# Allegro board ZWAVE_SWITCHV2.brd
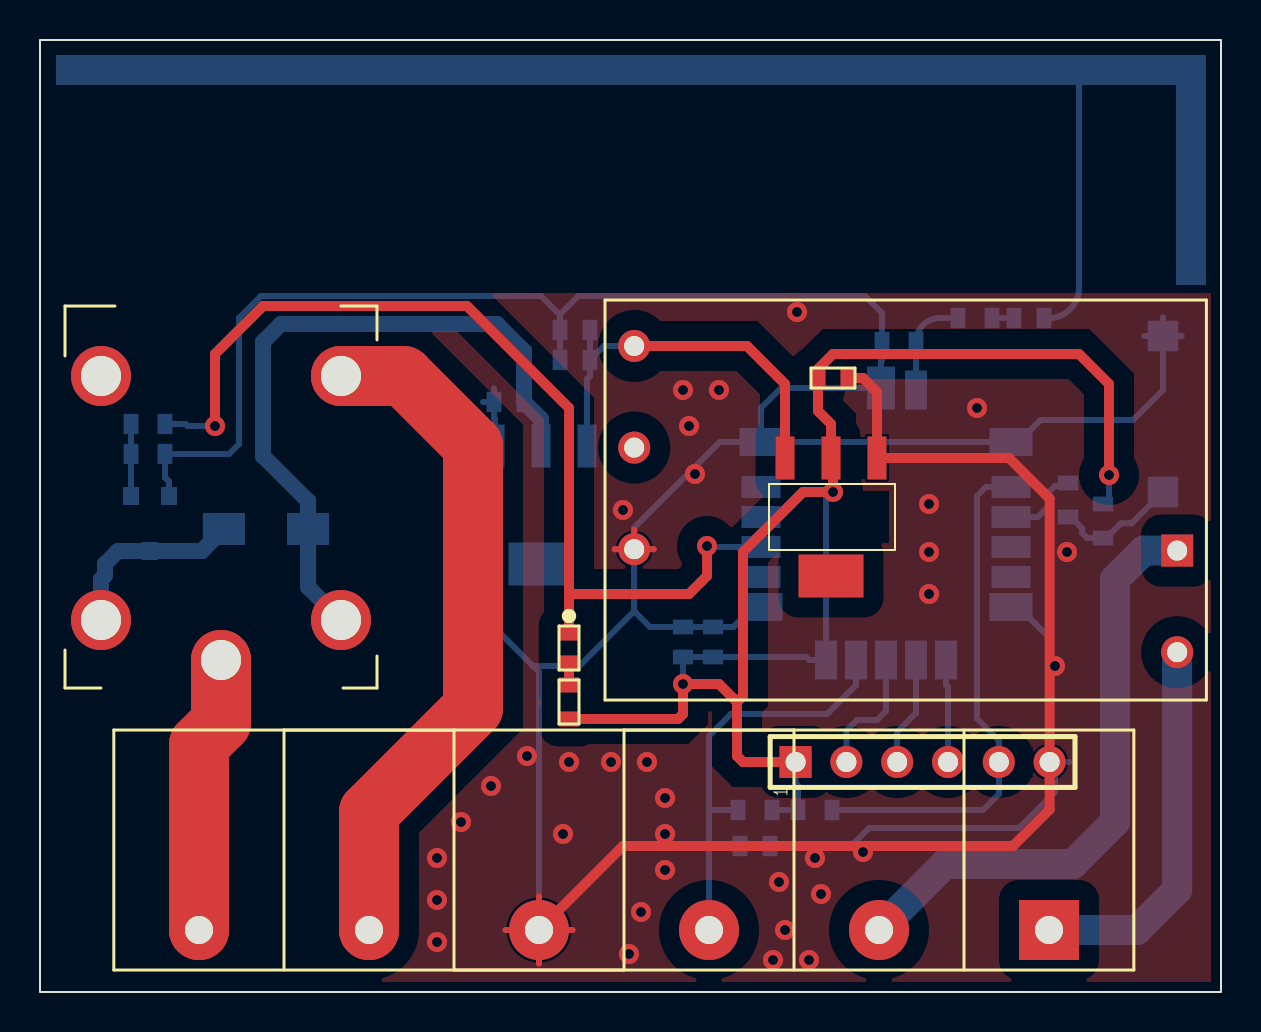
[diagram p0: board, top side]
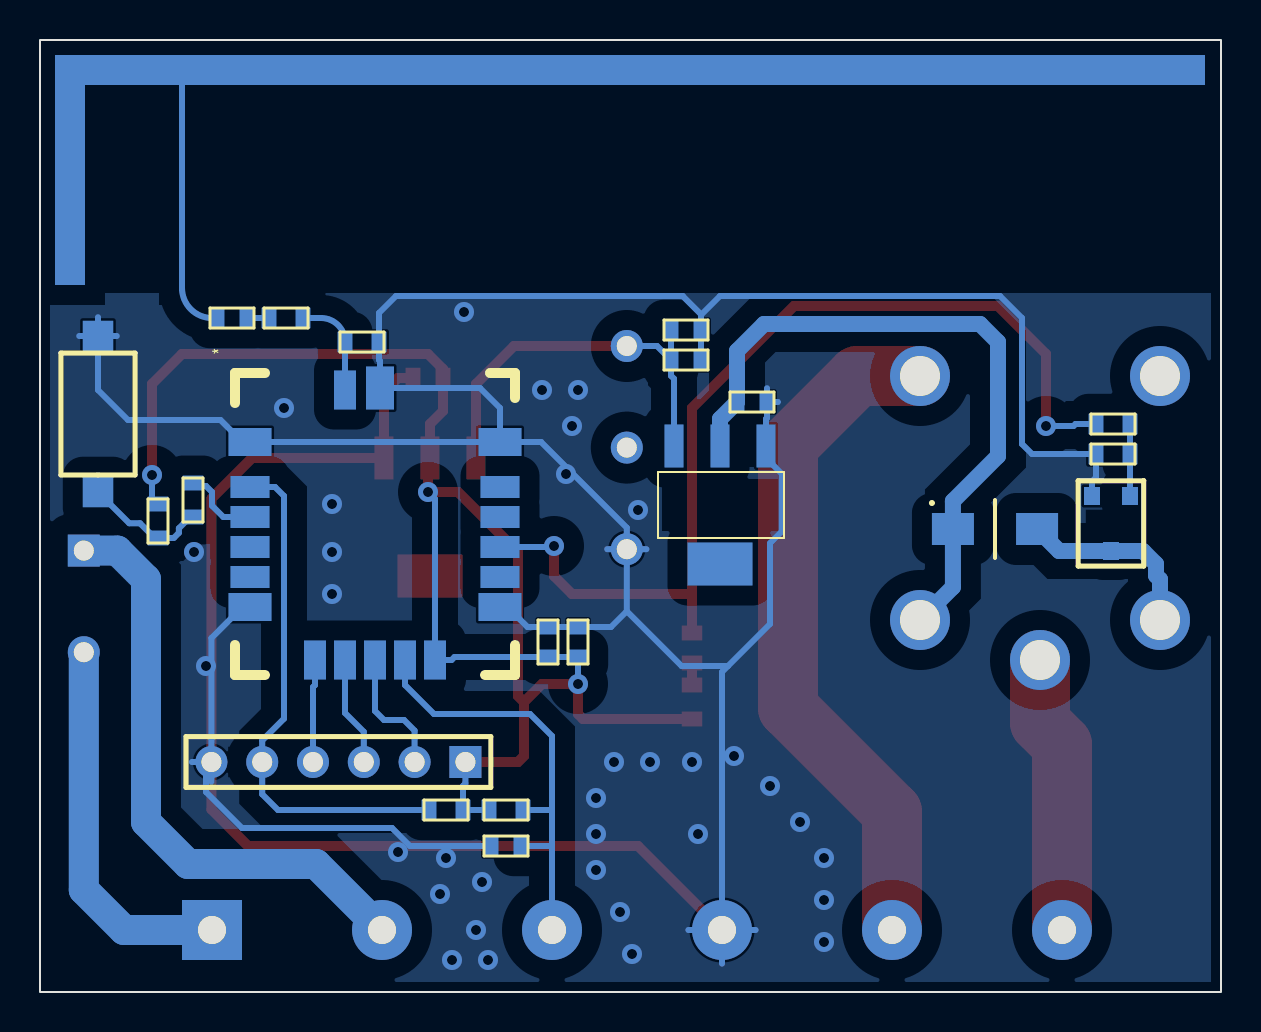
[diagram p1: board, bottom side, seen from below]

Outline 59.05 x 47.6 mm; copper layers: TOP, BOTTOM. Coordinates in mm from the lower left corner of the outline.
Outline path: rectangle 0,0 59.05,47.6

## Design rules (mm)
constraint set DEFAULT: min track width 0.3

## Placement (name value [footprint] x y rotation side)
AN1  MyAntena  [MYANTENA]  51.95 35.2 180 bottom
C1  104  [CAP_SMD_0603]  26.75 33.1 180 bottom
C2  104  [CAP_SMD_0603]  26.75 31.6 180 bottom
C3  104  [CAP_SMD_0603]  39.65 30.7 0 top
C4  104  [CAP_SMD_0603]  23.45 29.5 180 bottom
C6  33nF  [CAP_SMD_0603]  33.65 17.5 90 bottom
C7  4.7uF  [CAP_SMD_0603]  32.15 17.5 90 bottom
C8  3.3pF  [CAP_SMD_0603]  49.45 33.7 0 bottom
C9  104  [CAP_SMD_0603]  35.75 7.3 180 bottom
D1  PWM LED  [LED_SMD_0603]  26.45 17.2 270 top
D2  1N4007  [1N4007_SMD]  11.3 23.15 180 bottom
J3  CON6  [J1_6_254]  39.05 11.5 0 top
J5  CON6  [KF850_6P]  50.45 3.1 180 top
L1  3.9 nH  [RES_SMD_0603]  42.95 32.5 180 bottom
LS1  RELAY SPDT  [SONGLE_RELAY_5PINS]  9.05 24.7 180 top
M1  12V  [AC2DC_CONVERTER]  28.25 34.6 0 top
Q1  MMBT2222A  [SOT23]  4.55 24.8 180 bottom
R1  1k  [RES_SMD_0603]  5.4 28.4 0 bottom
R2  100k  [RES_SMD_0603]  5.4 26.9 0 bottom
R3  10K  [RES_SMD_0603]  53.15 23.55 270 bottom
R4  1k  [RES_SMD_0603]  51.4 24.6 90 bottom
R6  10K  [RES_SMD_0603]  38.75 9.1 180 bottom
R7  330R  [RES_SMD_0603]  26.45 14.5 90 top
R8  0R  [RES_SMD_0603]  46.75 33.7 0 bottom
R9  10K  [RES_SMD_0603]  35.75 9.1 180 bottom
SW1  SW_PB_SPST  [SMD_2PIN_BUTTON]  56.15 28.9 90 bottom
U1  AMS1117  [SOT223]  39.65 23.8 180 top
U2  AMS1117  [SOT223]  24.95 24.4 0 bottom
U3  ZM5202AU-CME3R  [ZM5202]  36.05 16.6 90 bottom

## Library data of the parts
AN1 = MyAntena
C1-C4 C6-C9 = CAPACITOR NON-POL
D1 = LED
D2 = DIODE_0
J3 J5 = CON6
L1 = INDUCTOR
LS1 = RELAY SPDT
M1 = AC2DC_Module
Q1 = NPN BEC_1
R1-R4 R6-R9 = R
SW1 = SW_PB_SPST
U1 U2 = ASM1117
U3 = ZM5202

## Footprints (pads in the part's own frame, mm; a bottom-side part is the same pattern mirrored in y, then rotated)
1N4007_SMD
  rect 2.1x1.6 smd: A(2.104,0) C(-2.104,0)
AC2DC_CONVERTER
  rect 1.6x1.6 hole 1: 1(28.61,-12.53)
  round 1.6 hole 1: 2(28.61,-17.61) 3(1.46,-2.3) 4(1.46,-7.38) 5(1.46,-12.46)
CAP_SMD_0603
  rect 0.74x1.02 smd: 1(-0.75,0) 2(0.75,0)
J1_6_254
  rect 1.6x1.6 hole 1: 1(-1.27,0)
  round 1.6 hole 1: 2(1.27,0) 3(3.81,0) 4(6.35,0) 5(8.89,0) 6(11.43,0)
KF850_6P
  rect 3x3 hole 1.4: 1(0,0)
  round 3 hole 1.4: 2(8.5,0) 3(17,0) 4(25.5,0) 5(34,0) 6(42.5,0)
LED_SMD_0603
  rect 0.74x1.02 smd: 1(-0.75,0) 2(0.75,0)
MYANTENA
  rect 0.3x0.3 smd: 1(0,0)
RES_SMD_0603
  rect 0.74x1.02 smd: 1(-0.85,0) 2(0.85,0)
SMD_2PIN_BUTTON
  rect 1.524x1.524 smd: 1(-3.9,0) 2(3.9,0)
SONGLE_RELAY_5PINS
  round 3 hole 2: 1(-6,6.1) 2(6,6.1) 3(0,8.1) 4(-6,-6.1) 5(6,-6.1)
SOT23
  rect 0.8x0.9 smd: 1(0,0) 2(-1.9,0) 3(-0.95,-2.75)
SOT223
  rect 3.25x2.15 smd: (0.1,3)
  rect 0.95x2.15 smd: 1(-2.201,-2.901) 2(0.099,-2.901) 3(2.399,-2.901)
ZM5202
  rect 1.4x2.15 smd: 1(10.9,12.5) 6(2.65,12.5) 12(2.65,0) 17(10.9,0)
  rect 1.1x1.95 smd: 2(8.65,12.5) 3(7.15,12.5) 4(5.65,12.5) 5(4.15,12.5) 13(4.15,0) 14(5.65,0) 15(7.15,0) 16(8.65,0)
  rect 1.95x1.1 smd: 7(0,9.25) 8(0,7.75) 9(0,6.25) 10(0,4.75) 11(0,3.25) 19(13.5,7.75)
  rect 2.15x1.4 smd: 18(13.6,6)

## Nets
3V3: C3.1 C6.1 C7.1 J3.1 R3.1 R6.2 R7.1 R9.1 U1.2(VOUT) U3.11
5V: C4.1 D2.C(K) LS1.1 U2.2(VOUT)
12V: C1.1 C2.1 M1.3 U1.3 U2.3
GND: C1.2 C2.2 C3.2 C4.2 C6.2 C7.2 C9.1 J3.6 J5.4 L1.2 M1.5 Q1.2(E) R2.2 SW1.2 U1.1 U2.1 U3.1 U3.6 U3.12 U3.17 U3.18
AC1: J5.2 M1.1
AC2: J5.1 M1.2(AC2)
BUTTON: C9.2 J5.3 R9.2 U3.10
MISO: J3.4 U3.7
MOSI: J3.2 U3.9
PWM: D1.1(CATHODE) R1.2 U3.14
RL1: J5.6 LS1.3
RL2: J5.5 LS1.4(NO)
SCK: J3.3 U3.8
ZWAVE_RESET: J3.5 R6.1 U3.2
N49770: R3.2 R4.1 SW1.1
N49928: R4.2 U3.3
N53653: Q1.1 R1.1 R2.1
N53737: D2.A LS1.2 Q1.3
N349270: L1.1 R8.1 U3.19
N349634: AN1.1(AN) C8.2
N502261: D1.2 R7.2
N3491880: C8.1 R8.2

Pads without a net: LS1 5; M1 4; U3 4 5 13 15 16

## Via types
v1: diameter 1, hole 0.5, TOP to BOTTOM, 39 vias

## Routing (per net, layer and track width the routed paths; a pad name or vN(x,y) marks a point on that pad's centre or on a via; arc(x,y) is an arc through that point)
3V3: length 78.4
  TOP w0.5: 34.85,14.5 35.15,14.8 35.15,22 38.15,25 v1(39.65,25) 39.65,26.6 U1.2 39.55,28.4 38.9,29.05 C3.1 38.9,31.15 39.65,31.9 51.95,31.9 53.45,30.4 v1(53.45,25.85) ; 34.85,14.5 33.95,15.4 v1(32.15,15.4) 32.15,13.9 31.9,13.65 R7.1 ; 34.85,14.5 34.85,11.8 35.15,11.5 J3.1
  BOTTOM w0.3: v1(53.45,25.85) 53.45,24.7 R3.1 ; v1(32.15,15.4) C7.1 C6.1 38.32,16.75 38.47,16.6 U3.11 39.3,24.65 v1(39.65,25) ; J3.1 37.78,10.42 37.9,10.3 R6.2 R9.1
5V: length 34.6
  BOTTOM w0.8: LS1.1 13.4,20.25 D2.C 13.4,24.55 11.15,26.8 11.15,32.5 12.05,33.4 22.85,33.4 24.2,32.05 C4.1 25.05,28.65 U2.2
12V: length 20.4
  TOP w0.5: U1.3 37.25,30.4 35.35,32.3 M1.3
  BOTTOM w0.3: M1.3 28.2,32.3 C2.1 ; C1.1 C2.1 ; C2.1 27.5,30.81 27.35,30.66 U2.3
GND: length 244.2
  TOP w0.3: J5.4 26.63,3.1 ; J5.4 23.27,3.1 ; J5.4 24.95,1.42 ; J5.4 24.95,4.78 ; 28.73,22.14 M1.5 ; M1.5 30.69,22.14 ; M1.5 29.71,23.12
  TOP w0.5: C3.2 41.15,30.7 41.85,30 U1.1 48.45,26.7 50.48,24.67 J3.6 50.48,9.13 48.65,7.3 29.15,7.3 J5.4
  BOTTOM w0.3: C9.1 40.55,7.3 41.45,8.2 48.95,8.2 50.75,10 50.75,11.23 J3.6 ; 24.65,16.3 26.97,16.3 29.71,19.04 ; 24.65,16.3 24.95,16 J5.4 ; 24.65,16.3 22.55,18.4 22.55,22.44 21.95,23.04 21.95,25.9 22.75,26.7 U2.1 22.75,28.65 22.7,28.7 C4.2 ; Q1.2 6.45,25.53 6.25,25.73 R2.2 9.45,26.9 9.95,27.4 9.95,33.7 11.05,34.8 25.05,34.8 26,33.85 ; M1.5 30.69,22.14 ; M1.5 29.71,19.04 ; M1.5 29.71,23.22 33.99,27.5 U3.17 ; M1.5 28.73,22.14 ; 29.71,19.04 30.5,18.25 C7.2 C6.2 34.67,18.25 35.67,19.25 U3.12 ; C4.2 22.7,30.19 ; C4.2 22.15,29.5 ; 26,33.85 26,33.89 26.91,34.8 41.25,34.8 42.1,33.95 L1.2 42.1,31.6 42.05,31.55 U3.18 37.05,30.2 36.05,29.2 U3.17 ; 26,33.85 C1.2 C2.2 ; SW1.2 56.15,33.74 ; SW1.2 55.21,32.8 ; SW1.2 56.15,30.1 54.65,28.6 50.03,28.6 48.93,27.5 U3.1 U3.17 ; SW1.2 57.09,32.8 ; J3.6 50.48,17.7 48.93,19.25 U3.6 ; J3.6 50.48,10.52 ; J3.6 51.46,11.5 ; 24.95,1.42 J5.4 ; J5.4 26.63,3.1 ; J5.4 23.27,3.1
  vias: v1(19.85,6.7) v1(19.85,4.6) v1(19.85,2.5) v1(21.05,8.5) v1(22.55,10.3) v1(24.35,11.8) v1(26.15,7.9) v1(26.45,11.5) v1(28.55,11.5) v1(29.15,24.1) v1(29.45,1.9) v1(30.05,4) v1(30.35,11.5) v1(31.25,9.7) v1(31.25,7.9) v1(31.25,6.1) v1(32.15,30.1) v1(32.45,28.3) v1(32.75,25.9) v1(33.95,30.1) v1(36.65,1.6) v1(36.95,5.5) v1(37.25,3.1) v1(37.85,34) v1(38.45,1.6) v1(38.75,6.7) v1(39.05,4.9) v1(41.15,7) v1(44.45,24.4) v1(44.45,22) v1(44.45,19.9) v1(46.85,29.2) v1(50.75,16.3) v1(51.35,22)
AC1: length 29.9
  BOTTOM w1.5: J5.2 45.25,6.4 51.65,6.4 53.75,8.5 53.75,20.64 55.18,22.07 M1.1
AC2: length 19.1
  BOTTOM w1.5: J5.1 54.85,3.1 56.86,5.11 M1.2
BUTTON: length 22.4
  BOTTOM w0.3: 33.45,7.3 33.45,9.1 ; 33.45,7.3 J5.3 ; 33.45,7.3 C9.2 ; 33.45,9.1 R9.2 ; 33.45,9.1 33.45,12.8 34.55,13.9 39.35,13.9 40.8,15.35 U3.10
MISO: length 5.1
  BOTTOM w0.3: U3.7 45.3,15.35 45.4,15.25 J3.4
MOSI: length 6.5
  BOTTOM w0.3: J3.2 40.32,13.07 40.85,13.6 41.85,13.6 42.3,14.05 U3.9
PWM: length 49.7
  TOP w0.5: v1(33.35,22.3) 33.35,20.8 32.45,19.9 26.45,19.9 ; 26.45,19.9 D1.1 ; 26.45,19.9 26.45,29.2 21.35,34.3 11.15,34.3 8.75,31.9 v1(8.75,28.3)
  BOTTOM w0.3: v1(33.35,22.3) 33.4,22.25 U3.14 ; R1.2 7.27,28.4 7.37,28.3 v1(8.75,28.3)
RL1: length 14
  TOP w3: LS1.3 9.05,13.47 7.95,12.37 J5.6
RL2: length 34.4
  TOP w3: J5.5 16.45,9 21.65,14.2 21.65,27.33 18.18,30.8 LS1.4
SCK: length 5.5
  BOTTOM w0.3: J3.3 42.86,13.01 43.8,13.95 U3.8
ZWAVE_RESET: length 25.9
  BOTTOM w0.3: R6.1 47.15,9.1 47.94,9.89 J3.5 47.94,12.58 46.85,13.67 46.85,24.8 47.3,25.25 U3.2
N49770: length 6.3
  BOTTOM w0.3: SW1.1 54.59,23.44 54.05,23.44 53.31,22.7 R3.2 52.36,22.7 52.11,22.96 52.11,23.18 51.54,23.75 R4.1
N49928: length 4
  BOTTOM w0.3: U3.3 49.88,23.75 50.45,24.32 50.45,25 50.75,25.3 51.25,25.3 R4.2
N53653: length 3.6
  BOTTOM w0.3: Q1.1 R2.1 R1.1
N53737: length 9.6
  BOTTOM w0.8: LS1.2 3.05,20.63 3.25,20.83 3.25,21.4 3.9,22.05 Q1.3 8.1,22.05 D2.A
N349270: length 5.2
  BOTTOM w0.3: U3.19 L1.1 arc(44.15,33.35) 45,33.7 R8.1
N349634: length 2.6
  BOTTOM w0.3: C8.2 50.45,33.7 arc(51.51,34.14) AN1.1
N502261: length 1.1
  TOP w0.5: D1.2 R7.2
N3491880: length 1.1
  BOTTOM w0.3: R8.2 C8.1

## Copper pours and planes (outline as drawn; the poured copper is in the pictures)
GND on TOP: 0.5,0.5 0.5,47.1 58.55,47.1 58.55,0.5 ; 2 cut-outs
GND on BOTTOM: 0.5,0.5 0.5,47.1 58.55,47.1 58.55,0.5 ; 11 cut-outs
Net_1 on BOTTOM (solid shape): 58.3,35.35 56.8,35.35 56.8,45.35 52.1,45.35 52.1,35.35 51.8,35.35 51.8,45.35 0.8,45.35 0.8,46.85 58.3,46.85
